# EAGLE board MagnetReaderDevice (EAGLE 9.6.2)
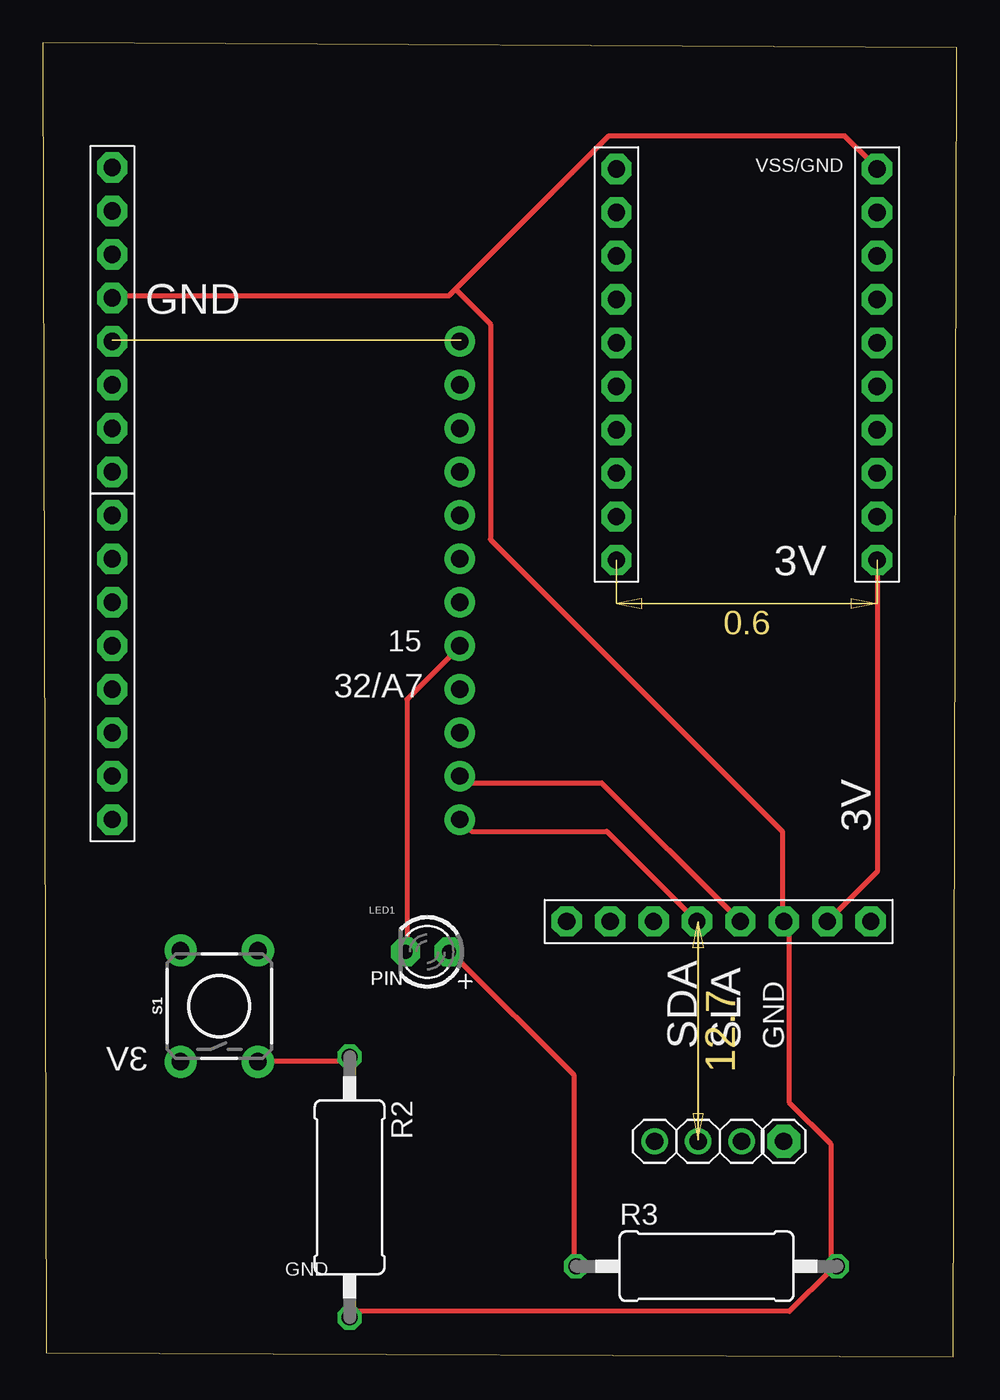
[diagram p0: board, top side]
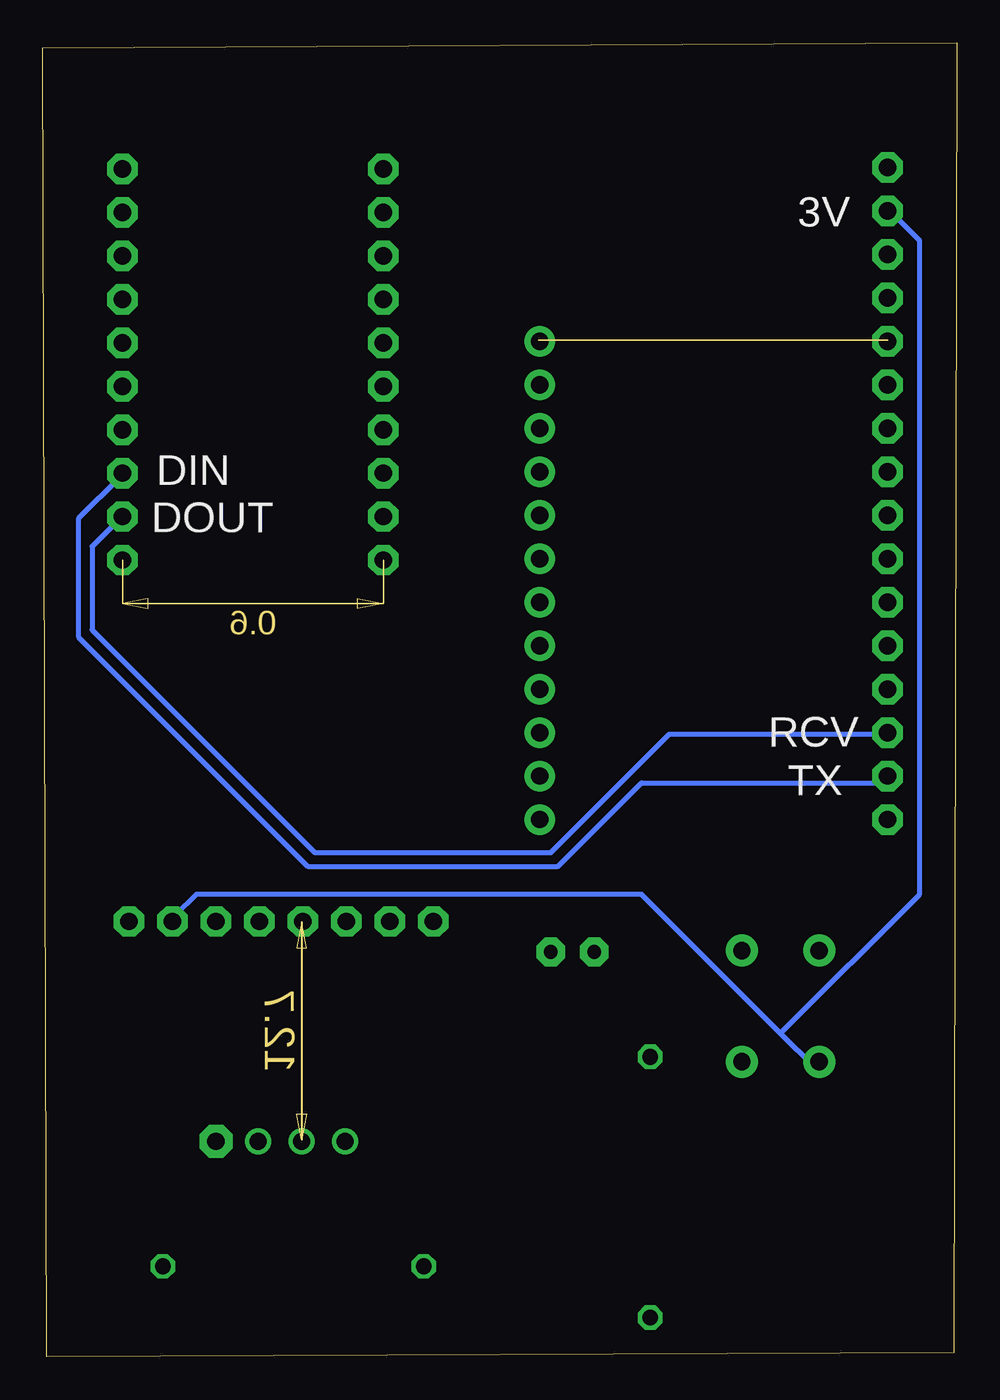
[diagram p1: board, bottom side, seen from below]

Size 53.43 x 76.78 mm. Coordinates in mm from the lower left corner, seen from the top.
Outline: 0.19,0.24 53.21,0 53.43,76.5 0,76.78 0.19,0.24
Copper layers (1*16): Top 0.035mm / dielectric 1.5mm / Bottom 0.035mm
Design rules "default": minimum track width 6mil, minimum drill 0.35mm, track to track 6mil, track to pad 6mil, pad to pad 6mil, via to via 6mil, smd to smd 6mil, copper to edge 40mil, drill to drill 6mil, minimum pad ring 10mil, minimum via ring 8mil, stop-mask expansion 4mil, vias tented up to drill 0mil, thermal gap 10mil
Net classes: 0 default: width 0.305 mm, drill 0.508 mm, clearance 0.508 mm

## Footprints (pad centres in the part's own frame; a part is rotated, then mirrored left to right if it is on the bottom)
1X03 = drill 1.016: 1 -2.54,0; 2 0,0; 3 2.54,0
1X08-BIG = drill 1.016 pad 1.778 octagon: 1 -8.89,0; 2 -6.35,0; 3 -3.81,0; 4 -1.27,0; 5 1.27,0; 6 3.81,0; 7 6.35,0; 8 8.89,0
1X01 = drill 1.016 pad 1.93 octagon: 1 0,0
1X12-CB = drill 1.016 pad 1.778: 1 -13.97,0; 2 -11.43,0; 3 -8.89,0; 4 -6.35,0; 5 -3.81,0; 6 -1.27,0; 7 1.27,0; 8 3.81,0; 9 6.35,0; 10 8.89,0; 11 11.43,0; 12 13.97,0
LED3MM = drill 0.813 pad 1.676 octagon: A -1.27,0; K 1.27,0
0411/15 = drill 0.914 octagon: 1 -7.62,0; 2 7.62,0
TACTILE_SWITCH_PTH_6.0MM = drill 1.016 pad 1.88: 1 -3.251,2.261; 2 3.251,2.261; 3 -3.251,-2.261; 4 3.251,-2.261
1X10-BIG = drill 1.016 pad 1.778 octagon: 1 -11.43,0; 2 -8.89,0; 3 -6.35,0; 4 -3.81,0; 5 -1.27,0; 6 1.27,0; 7 3.81,0; 8 6.35,0; 9 8.89,0; 10 11.43,0

## Placement (x,y rotation side)
JP1  [1X03]  38.3,12.59 0 top
JP2  [1X08-BIG]  39.5,25.44 0 top
JP3  [1X01]  43.3,12.59 0 top
JP5  [1X12-CB]  24.38,45.36 90 top
JP6  [1X08-BIG]  4.06,60.6 270 top
JP7  [1X08-BIG]  4.06,40.28 270 top
LED1  [LED3MM]  22.47,23.66 180 top
R2  [0411/15]  17.93,9.91 270 top
R3  [0411/15]  38.79,5.29 0 top
S1  MOMENTARY-SWITCH-SPST-PTH-6.0MM  [TACTILE_SWITCH_PTH_6.0MM]  10.31,20.49 90 top
U$1  PINHD-1X10  [1X10-BIG]  33.53,57.98 270 top
U$2  PINHD-1X10  [1X10-BIG]  48.77,57.98 90 top

## Library data of the parts
JP1-JP3 JP5-JP7 LED1 R2 R3 U$1 U$2 = adafruit
S1 = SparkFun-Switches; PROD_ID: SWCH-08441; SF_SKU: COM-00097

## Nets
GND: JP2.6 JP6.4 R2.2 R3.2 U$2.10
N$1: JP2.4 JP5.1
N$2: R2.1 S1.3
N$3: JP2.5 JP5.2
N$4: JP7.6 U$2.2
N$5: JP5.5 LED1.K
N$6: LED1.A R3.1
N$9: JP7.7 U$2.3
N$10: JP5.4
VCC: JP2.7 JP6.2 S1.1 U$2.1

## Tracks (layer width: path | path; a pad name or v marks a point on that pad's centre or on a via)
GND
  Top 0.305: R2.2 18.03,2.64 43.64,2.64 46.07,5.08 R3.2 46.07,5.49 46.07,12.4 43.64,14.84 43.64,25.4 JP2.6 43.23,25.81 43.23,30.69 26.16,47.76 26.16,60.35 24.13,62.39 | 24.13,62.39 33.07,71.33 46.89,71.33 48.51,69.7 U$2.10 | 24.13,62.39 23.72,61.98 4.22,61.98 JP6.4
N$1
  Top 0.305: JP5.1 25.06,30.71 32.96,30.71 JP2.4
N$2
  Top 0.305: R2.1 17.63,17.28 12.75,17.28 S1.3
N$3
  Top 0.305: JP2.5 40.39,25.81 32.66,33.53 24.54,33.53 JP5.2
N$4
  Bottom 0.305: JP7.6 4.22,36.38 16.81,36.38 23.72,29.47 37.54,29.47 50.55,42.47 50.55,47.35 48.92,48.97 U$2.2
N$5
  Top 0.305: LED1.K 21.28,23.78 21.28,38.41 24.13,41.25 JP5.5
N$6
  Top 0.305: R3.1 31.04,5.49 31.04,16.46 24.13,23.37 LED1.A
N$9
  Bottom 0.305: JP7.7 4.22,33.53 18.44,33.53 23.32,28.65 37.95,28.65 51.36,42.07 51.36,48.97 48.92,51.41 U$2.3
VCC
  Top 0.305: U$2.1 48.77,28.35 JP2.7
  Bottom 0.305: 10.31,18.9 8.28,16.87 S1.1 | 10.31,18.9 18.44,27.03 44.45,27.03 45.67,25.81 JP2.7 | 10.31,18.9 2.18,27.03 2.18,65.23 3.81,66.86 JP6.2

## Text on the board
tPlace: VSS/GND | 15
tNames: GND | 3V | 32/A7 | 3V | PIN | PIN | SDA | SLA | GND | 3V | GND
bNames: 3V | DIN | DOUT | RCV | TX